# Altium PCB car_board.PcbDoc
Units mil, origin at the board's own origin, x right, y up, seen from the top; angles counter-clockwise.
Board outline 4485 x 2249 mil, 2 copper layers (Top Layer, Bottom Layer); 73 components, 79 nets, 374 pads, 109 vias.
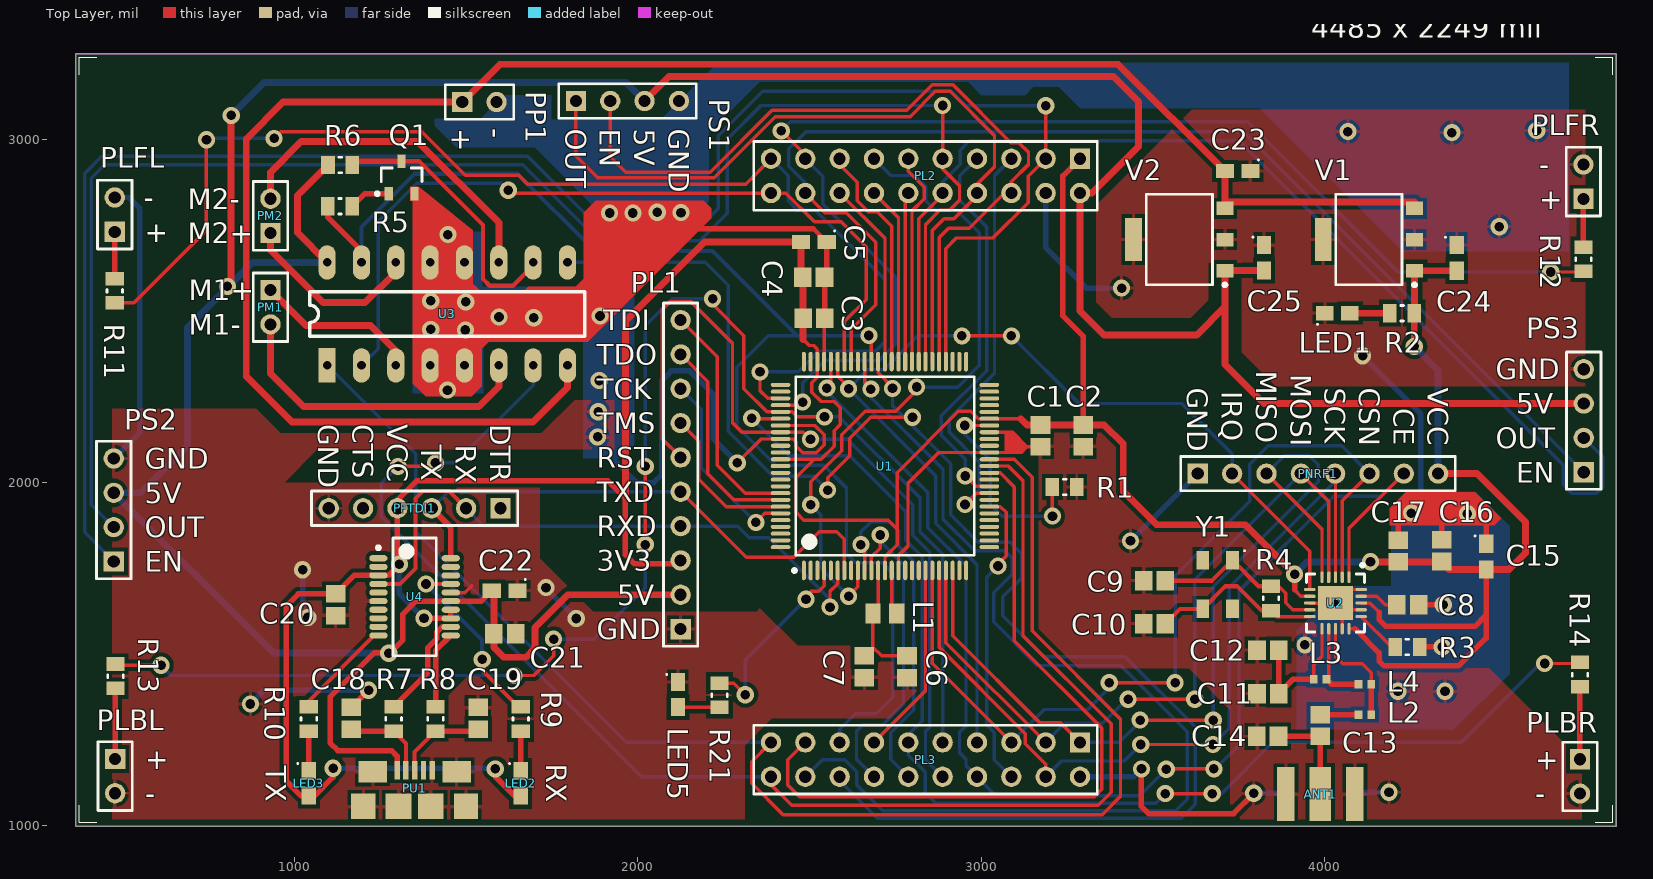
[diagram p0: Top Layer view]
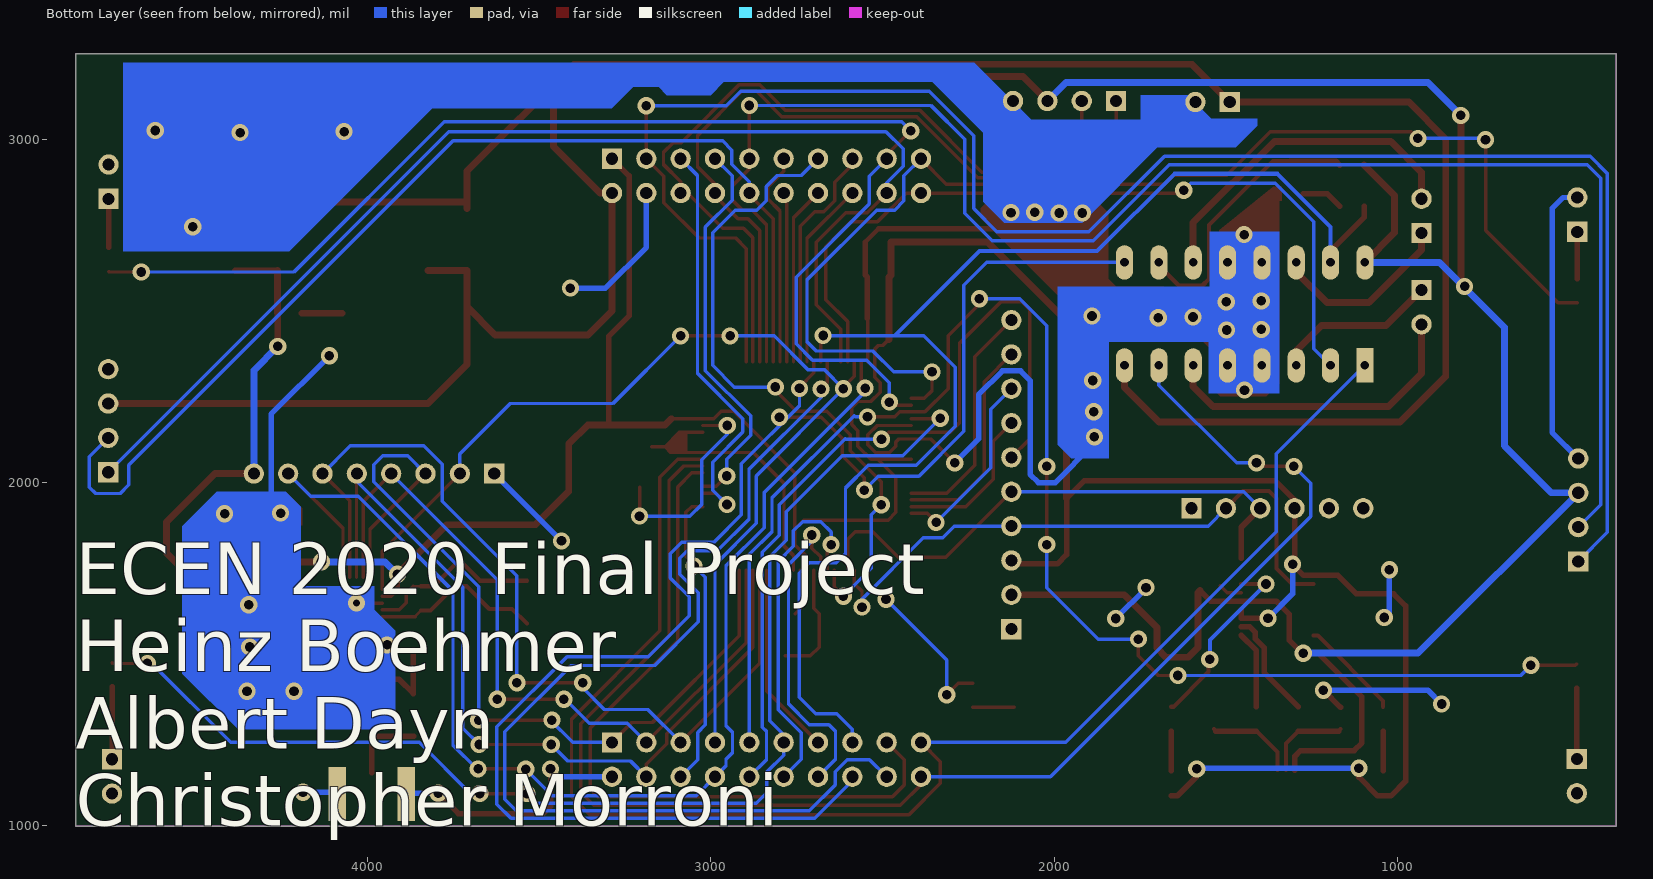
[diagram p1: Bottom Layer view, seen from below]

## Layer stack, top to bottom
Top Solder: solder mask 0.4, Solder Resist, Dk 3.5
Top Layer: signal copper 1.4
Dielectric 1: dielectric 12.6, FR-4, Dk 4.8
Bottom Layer: signal copper 1.4
Bottom Solder: solder mask 0.4, Solder Resist, Dk 3.5

## Board outline
364,999 364,3248 4849,3248 4849,999

## Design rules (kind name [scope] priority, off if disabled: settings)
BoardOutlineClearance [All] p1: gap=15
Clearance "Ground Plane Clearance" [InNet('GND') and InPolygon] p1: gap=12
Clearance [All] p2: gap=6
HoleSize [All] p1: absolutevalues=TRUE maxlimit=265 minlimit=13 maxpercent=80.000 minpercent=20.000
MinimumAnnularRing [All] p1: minimumring=7
MinimumSolderMaskSliver [All] p1: minsoldermaskwidth=4
PlaneConnect [All] p1: planeconnectstyle=Relief reliefexpansion=20 reliefentries=4 reliefconductorwidth=16 reliefairgap=10
PolygonConnect [All] p1: connectstyle=Relief reliefconductorwidth=10 reliefentries=4 polygonreliefangle="90 Angle" airgapwidth=10
RoomDefinition [InComponentClass('Components Class 1') vs False] p1: confinementstyle=ConfineIn formatcopy=TRUE lockcomponents=FALSE outline 4459.13,2403.55 3408.13,2403.55 3408.13,3071.55 4459.13,3071.55
RoomDefinition nrf [InComponentClass('nrf')] p2: confinementstyle=ConfineIn formatcopy=TRUE lockcomponents=FALSE outline 4583,2182 3416,2182 3416,999 4583,999
RoomDefinition motor_driver [InComponentClass('motor_driver')] p3: confinementstyle=ConfineIn formatcopy=TRUE lockcomponents=FALSE outline 1869.43,2051.43 1869.43,3060 749.43,3060 749.43,2051.43
RoomDefinition ftdi [InComponentClass('ftdi')] p4: confinementstyle=ConfineIn formatcopy=TRUE lockcomponents=FALSE outline 1855.15,1000 1855.15,2176 813.15,2176 813.15,1000
RoomDefinition car_msp_breakouts [InComponentClass('car_msp_breakouts')] p5: confinementstyle=ConfineIn formatcopy=TRUE lockcomponents=FALSE outline 2041,3030 2041,1017 3432,1017 3432,3030
RoutingVias [All] p1: holewidth=28 width=50 viastyle="Through Hole" minholewidth=28 minwidth=50 maxholewidth=28 maxwidth=50
SolderMaskExpansion "Tent Vias" [IsVia] p1: expansion=-25
SolderMaskExpansion [All] p2: expansion=4
Width [All] p1: maxlimit=20 minlimit=6 preferedwidth=12 minimp=50.000000 maximp=50.000000 favimp=50.000000
27 further rules are at their usual default settings.

## Classes and differential pairs
component class "Components Class 1": C23 C24 C25 LED1 R2 V1 V2
component class sensors: PS1 PS2 PS3
component class power: C23 C24 C25 LED1 PP1 R2 V1 V2
component class nrf: ANT1 C8 C9 C10 C11 C12 C13 C14 C15 C16 C17 L2 L3 L4 PNRF1 R3 R4 U2 Y1
component class motor_driver: PM1 PM2 Q1 R5 R6 U3
component class lights: PLBL PLBR PLFL PLFR R11 R12 R13 R14
component class ftdi: C18 C19 C20 C21 C22 LED2 LED3 PFTDI1 PU1 R7 R8 R9 R10 U4
component class car_msp_breakouts: C1 C2 C3 C4 C5 C6 C7 L1 LED5 PL1 PL2 PL3 R1 R21

## Components (designator, comment, footprint, x,y, rotation, side; value= is the part's Value field where it differs from the comment)
ANT1 "Connector" RP-SMA 3988,1014 r0 top
C1 "Cap" 0805-C 3173,2136 r90 top
C2 "Cap" 0805-C 3297,2136 r90 top
C3 "Cap" 0805-C 2513,2478 r180 top
C4 "Cap" 0805-C 2512.5,2598 r180 top
C5 "Cap Pol1" 0805-TC 2513,2700 r0 top
C6 "Cap" 0805-C 2784,1463.5 r90 top
C7 "Cap" 0805-C 2660,1463.5 r90 top
C8 "Cap" 0805-C 4242.5,1644 r180 top
C9 "Cap" 0805-C 3504.5,1714 r0 top
C10 "Cap" 0805-C 3504.5,1589 r0 top
C11 "Cap" 0805-C 3835,1385 r0 top
C12 "Cap" 0805-C 3835,1512 r0 top
C13 "Cap" 0805-C 3988,1292.5 r270 top
C14 "Cap" 0805-C 3834.5,1261 r0 top
C15 "Cap Pol1" 0805-TC 4471,1784.4 r90 top
C16 "Cap" 0805-C 4341,1801.5 r270 top
C17 "Cap" 0805-C 4215,1800.5 r270 top
C18 "Cap" 0805-C 1166.15,1313.5 r270 top
C19 "Cap" 0805-C 1535.15,1313.5 r270 top
C20 "Cap" 0805-C 1120.15,1644 r90 top
C21 "Cap" 0805-C 1612.65,1559 r180 top
C22 "Cap Pol1" 0805-TC 1612.55,1685 r0 top
C23 "Cap Pol1" 0805-TC 3747.4,2907.1 r0 top
C24 "Cap Pol1" 0805-TC 4385.13,2654.15 r90 top
C25 "Cap Pol1" 0805-TC 3824,2654.5 r90 top
L1 "Inductor" 0805-L 2719.84,1618 r180 top
L2 "Inductor" 0402-L 4117.5,1324 r180 top
L3 "Inductor" 0402-L 3987.5,1427 r180 top
L4 "Inductor" 0402-L 4117.5,1413 r0 top
LED1 "LED2" 0805-LED 4037.58,2493.1 r180 top
LED2 "RED" 0805-LED 1659.15,1123.58 r90 top
LED3 "YELLOW" 0805-LED 1042.15,1123.58 r90 top
LED5 "LED2" 0805-LED 2117,1382.58 r90 top
PFTDI1 "Header 6" HDR1X6 1600.15,1925 r180 top
PL1 "Programming_Header" HDR1X10 2125,1573 r90 top
PL2 "Left_Launchpad_Header" HDR2X10 3288,2943 r180 top
PL3 "Right_Launchpad_Header" HDR2X10 3288,1243 r180 top
PLBL "Header 2" HDR1X2 478,1195 r270 top
PLBR "Header 2" HDR1X2 4744,1194 r270 top
PLFL "Header 2" HDR1X2 477,2730 r90 top
PLFR "Header 2" HDR1X2 4754,2826 r90 top
PM1 "Header 2" HDR1X2 930.43,2560.43 r270 top
PM2 "Header 2" HDR1X2 930.43,2726.43 r90 top
PNRF1 "nRF_Bypass" HDR1X8 3631,2026 r0 top
PP1 "Header 2" HDR1X2 1489,3108 r0 top
PS1 "Header 4" HDR1X4 1820,3111 r0 top
PS2 "Header 4" HDR1X4 474,1770 r90 top
PS3 "Header 4" HDR1X4 4755,2030 r90 top
PU1 "Micro_USB" Micro_USB 1350.39,999.91 r0 top
Q1 "NPN" SOT23 1312.43,2888.43 r90 top
R1 "Res1" 0805-R 3243,1987 r0 top
R2 "Res1" 0805-R 4226,2493.1 r180 top
R3 "Res1" 0805-R 4241.57,1521 r180 top
R4 "Res1" 0805-R 3844,1662.43 r270 top
R5 "Res1" 0805-R 1132.99,2804.43 r0 top
R6 "Res1" 0805-R 1133.43,2924.43 r180 top
R7 "Res1" 0805-R 1289.15,1311.43 r90 top
R8 "Res1" 0805-R 1411.15,1311.43 r90 top
R9 "Res1" 0805-R 1659.15,1311.43 r270 top
R10 "Res1" 0805-R 1042.15,1311.43 r270 top
R11 "Res1" 0805-R 477,2558.43 r90 top
R12 "Res1" 0805-R 4754,2650 r90 top
R13 "Res1" 0805-R 479,1436 r270 top
R14 "Res1" 0805-R 4744,1440.43 r270 top
R21 "Res1" 0805-R 2238,1380.57 r270 top
U1 "MSP432P401R" TSQFP50P1600X1600X160-100N 2720,2048 r90 top
U2 "nRF24L01+" QFN50P400X400X95_HS-21N 4032,1649 r270 top
U3 "SN754410" DIP16 1095.45,2341 r90 top
U4 "FTS31XS-U" SOP64P570X175-20N 1350.15,1667 r0 top
V1 "3.3V Regulator" SOT230P700X180-4N 4129.13,2707.55 r180 top
V2 "5V Regulator" SOT230P700X180-4N 3577.13,2707.55 r180 top
Y1 "16MHz" DFNCRY 3688.69,1702.87 r270 top

## Footprints (in the part's own frame and the unit in brackets; to place one, negate y for a bottom-side part, rotate by r counter-clockwise, add the part's x,y. Pads: shape width x height; smd on the part's side, far side on the other; paste and mask are expansions set on the pad)
0402-L [mm] "Chip Inductor, 2-Leads, Body 1.00x0.50mm, IPC Medium Density"
  rect 0.57x0.62 smd: 1(-0.47,0) 2(0.47,0)
  body extent -0.53,-0.28 0.53,0.27, height 0.55
0805-C [mm] "Chip Capacitor, 2-Leads, Body 2.00x1.25mm, IPC Medium Density"
  rect 1.3x1.45 smd: 1(-0.8,0) 2(0.8,0)
  body extent -1.1,-0.72 1.1,0.72, height 1.4
0805-L [mm] "Chip Inductor, 2-Leads, Body 2.00x1.25mm, IPC Medium Density"
  rect 1.13x1.47 smd: 1(-0.885,0) 2(0.885,0)
  body extent -1.1,-0.72 1.1,0.72, height 1.45
0805-LED [mm] "Molded Diode, 2-Leads, Body 2.00x1.25mm, IPC Medium Density"
  rect 1.3x1.05 smd: 1(-0.925,0) 2(0.925,0)
  silkscreen extent 1.43,0.78 1.52,0.87, body extent -1.05,-0.67 1.05,0.67, height 0.4
0805-R [mm] "Chip Resistor, 2-Leads, Body 2.00x1.25mm, IPC Medium Density"
  rect 1x1.35 smd: 1(-0.9,0) 2(0.9,0)
  silkscreen extent -0.1,-0.58 0.1,0.58, body extent -1.05,-0.67 1.05,0.67, height 0.6
0805-TC [mm] "Molded Capacitor, 2-Leads, Body 2.05x1.40mm, IPC Medium Density"
  rect 1.35x1.05 smd: 1(-0.95,0) 2(0.95,0)
  silkscreen extent 1.48,0.78 1.57,0.87, body extent -1.13,-0.77 1.12,0.77, height 1.5
DFNCRY [mm] "DFN, 4-Leads, Body 3.20x5.00mm, Pitch 3.60mm, IPC Medium Density"
  rect 1.35x0.95 smd: 1(-1.8,1.1) 2(-1.8,-1.1) 3(1.8,-1.1) 4(1.8,1.1)
  silkscreen extent -2.55,1.95 -2.45,2.05, body extent -2.5,-1.6 2.5,1.6, height 1
DIP16 [mil]
  rect 100x50 hole 25: 1(0,0)
  oval 100x50 hole 25: 2(0,-100) 3(0,-200) 4(0,-300) 5(0,-400) 6(0,-500) 7(0,-600) 8(0,-700) 9(300,-700) 10(300,-600) 11(300,-500) 12(300,-400) 13(300,-300) 14(300,-200) 15(300,-100) 16(300,0)
  silkscreen extent 85,-750 215,50
HDR1X2 [mm] "Connector; Header; 2 Position"
  rect 1.5x1.5 hole 0.9: 1(0,0)
  round 1.5 hole 0.9: 2(2.54,0)
  silkscreen extent -1.27,-1.27 3.81,1.27
HDR1X4 [mm] "Connector; Header; 4 Position"
  rect 1.5x1.5 hole 0.9: 1(0,0)
  round 1.5 hole 0.9: 2(2.54,0) 3(5.08,0) 4(7.62,0)
  silkscreen extent -1.27,-1.27 8.89,1.27
HDR1X6 [mm] "Connector; Header; 6 Position"
  rect 1.5x1.5 hole 0.9: 1(0,0)
  round 1.5 hole 0.9: 2(2.54,0) 3(5.08,0) 4(7.62,0) 5(10.16,0) 6(12.7,0)
  silkscreen extent -1.27,-1.27 13.97,1.27
HDR1X8 [mm] "Connector; Header; 8 Position"
  rect 1.5x1.5 hole 0.9: 1(0,0)
  round 1.5 hole 0.9: 2(2.54,0) 3(5.08,0) 4(7.62,0) 5(10.16,0) 6(12.7,0) 7(15.24,0) 8(17.78,0)
  silkscreen extent -1.27,-1.27 19.05,1.27
HDR1X10 [mm] "Connector; Header; 10 Position"
  rect 1.5x1.5 hole 0.9: 1(0,0)
  round 1.5 hole 0.9: 2(2.54,0) 3(5.08,0) 4(7.62,0) 5(10.16,0) 6(12.7,0) 7(15.24,0) 8(17.78,0) 9(20.32,0) 10(22.86,0)
  silkscreen extent -1.27,-1.27 24.13,1.27
HDR2X10 [mm] "Connector; Header; 10x2 Position"
  rect 1.5x1.5 hole 0.9: 1(0,0)
  round 1.5 hole 0.9: 2(0,2.54) 3(2.54,0) 4(2.54,2.54) 5(5.08,0) 6(5.08,2.54) 7(7.62,0) 8(7.62,2.54) 9(10.16,0) 10(10.16,2.54) 11(12.7,0) 12(12.7,2.54) 13(15.24,0) 14(15.24,2.54) 15(17.78,0) 16(17.78,2.54) 17(20.32,0) 18(20.32,2.54) 19(22.86,0) 20(22.86,2.54)
  silkscreen extent -1.27,-1.27 24.13,3.81
Micro_USB [mm]
  rect 1.8x1.9 smd: 0(-3.8,1.45) 0(3.8,1.45)
  rect 2.1x1.6 smd: 0(-3.1,4) 0(3.1,4)
  rect 1.9x1.9 smd: 0(-1.2,1.45) 0(1.2,1.45)
  rect 0.4x1.35 smd: 1(-1.3,4.125) 2(-0.65,4.125) 3(0,4.125) 4(0.65,4.125) 5(1.3,4.125)
QFN50P400X400X95_HS-21N [mm] "QFN, 20-Leads, Body 4.00x4.00mm, Pitch 0.50mm, Thermal Pad 2.50x2.60mm, IPC Medium Density"
  rect 2.5x2.6 smd: 0(0,0)
  oval 0.85x0.25 smd: 1(-1.9,1) 2(-1.9,0.5) 3(-1.9,0) 4(-1.9,-0.5) 5(-1.9,-1) 11(1.9,-1) 12(1.9,-0.5) 13(1.9,0) 14(1.9,0.5) 15(1.9,1)
  oval 0.25x0.85 smd: 6(-1,-1.9) 7(-0.5,-1.9) 8(0,-1.9) 9(0.5,-1.9) 10(1,-1.9) 16(1,1.9) 17(0.5,1.9) 18(0,1.9) 19(-0.5,1.9) 20(-1,1.9)
  silkscreen extent -2.92,-2.15 2.15,2.15, body extent -2,-2 2,2, height 0.95
RP-SMA [mm]
  rect 1.3x4 smd: 1(-2.55,2) 3(2.55,2)
  rect 1.6x4 smd: 2(0,2)
  rect 1.3x4 smd far side: 4(2.55,2) 5(-2.55,2)
SOP64P570X175-20N [mm] "SOP, 20-Leads, Body 8.65x3.90mm, Pitch 0.64mm, IPC Medium Density"
  oval 1.35x0.45 smd: 1(-2.675,2.857) 2(-2.675,2.222) 3(-2.675,1.587) 4(-2.675,0.953) 5(-2.675,0.318) 6(-2.675,-0.318) 7(-2.675,-0.953) 8(-2.675,-1.587) 9(-2.675,-2.222) 10(-2.675,-2.857) 11(2.675,-2.857) 12(2.675,-2.222) 13(2.675,-1.587) 14(2.675,-0.953) 15(2.675,-0.318) 16(2.675,0.318) 17(2.675,0.953) 18(2.675,1.587) 19(2.675,2.222) 20(2.675,2.857)
  silkscreen extent -2.8,-4.35 1.6,4.35, body extent -2,-4.35 2,4.35, height 1.76
SOT23 [mm] "SOT23, 3-Leads, Body 2.92x2.37mm, Pitch 0.95mm, IPC Medium Density"
  rect 1x0.6 smd: 1(-1.2,0.95) 2(-1.2,-0.95) 3(1.2,0)
  silkscreen extent -1.32,-1.5 0.7,1.92, body extent -0.7,-1.52 0.7,1.52, height 1.11
SOT230P700X180-4N [mm] "SOT223, 4-Leads, Body 6.50x7.00mm (avg), Pitch 2.30mm, IPC Medium Density"
  rect 1.25x1 smd: 1(-3.375,2.3) 2(-3.375,0) 3(-3.375,-2.3)
  rect 1.25x3.2 smd: 2(3.375,0)
  silkscreen extent -3.5,-3.35 2.45,3.47, body extent -1.85,-3.35 1.85,3.35, height 1.8
TSQFP50P1600X1600X160-100N [mm] "TSQFP, 100-Leads, Body 14.00x14.00mm, Pitch 0.50mm, IPC Medium Density"
  oval 1.45x0.3 smd: 1(-7.725,6) 2(-7.725,5.5) 3(-7.725,5) 4(-7.725,4.5) 5(-7.725,4) 6(-7.725,3.5) 7(-7.725,3) 8(-7.725,2.5) 9(-7.725,2) 10(-7.725,1.5) 11(-7.725,1) 12(-7.725,0.5) 13(-7.725,0) 14(-7.725,-0.5) 15(-7.725,-1) 16(-7.725,-1.5) 17(-7.725,-2) 18(-7.725,-2.5) 19(-7.725,-3) 20(-7.725,-3.5) 21(-7.725,-4) 22(-7.725,-4.5) 23(-7.725,-5) 24(-7.725,-5.5) 25(-7.725,-6) 51(7.725,-6) 52(7.725,-5.5) 53(7.725,-5) 54(7.725,-4.5) 55(7.725,-4) 56(7.725,-3.5) 57(7.725,-3) 58(7.725,-2.5) 59(7.725,-2) 60(7.725,-1.5) 61(7.725,-1) 62(7.725,-0.5) 63(7.725,0) 64(7.725,0.5) 65(7.725,1) 66(7.725,1.5) 67(7.725,2) 68(7.725,2.5) 69(7.725,3) 70(7.725,3.5) 71(7.725,4) 72(7.725,4.5) 73(7.725,5) 74(7.725,5.5) 75(7.725,6)
  oval 0.3x1.45 smd: 26(-6,-7.725) 27(-5.5,-7.725) 28(-5,-7.725) 29(-4.5,-7.725) 30(-4,-7.725) 31(-3.5,-7.725) 32(-3,-7.725) 33(-2.5,-7.725) 34(-2,-7.725) 35(-1.5,-7.725) 36(-1,-7.725) 37(-0.5,-7.725) 38(0,-7.725) 39(0.5,-7.725) 40(1,-7.725) 41(1.5,-7.725) 42(2,-7.725) 43(2.5,-7.725) 44(3,-7.725) 45(3.5,-7.725) 46(4,-7.725) 47(4.5,-7.725) 48(5,-7.725) 49(5.5,-7.725) 50(6,-7.725) 76(6,7.725) 77(5.5,7.725) 78(5,7.725) 79(4.5,7.725) 80(4,7.725) 81(3.5,7.725) 82(3,7.725) 83(2.5,7.725) 84(2,7.725) 85(1.5,7.725) 86(1,7.725) 87(0.5,7.725) 88(0,7.725) 89(-0.5,7.725) 90(-1,7.725) 91(-1.5,7.725) 92(-2,7.725) 93(-2.5,7.725) 94(-3,7.725) 95(-3.5,7.725) 96(-4,7.725) 97(-4.5,7.725) 98(-5,7.725) 99(-5.5,7.725) 100(-6,7.725)
  silkscreen extent -7.85,-6.6 6.6,6.82, body extent -7,-7 7,7, height 1.6

## Part data
ANT1: library part Antenna_Connector
C1 C2 C3 C4 C6 C7 C8 C9 C10 C11 C12 C13 C14 C16 C17 C18 C19 C20 C21: "Capacitor"
C5 C15 C22 C23 C24 C25: "Polarized Capacitor (Radial)"
LED1 LED5: "Typical RED, GREEN, YELLOW, AMBER GaAs LED"
LED2 LED3: library part LED2, "Typical RED, GREEN, YELLOW, AMBER GaAs LED"
PFTDI1: "Header, 6-Pin"
PL1: library part "Header 10", "Header, 10-Pin"
PL2 PL3: library part "Header 10X2", "Header, 10-Pin, Dual row"
PLBL PLBR PLFL PLFR PM1 PM2 PP1: "Header, 2-Pin"
PNRF1: library part "Header 8", "Header, 8-Pin"
PS1 PS2 PS3: "Header, 4-Pin"
Q1: "NPN Bipolar Transistor"
R1 R2 R3 R4 R5 R6 R7 R8 R9 R10 R11 R12 R13 R14 R21: "Resistor"
U1: library part MSP432
V1 V2: library part NCP1117
Y1: library part XTAL, "Crystal Oscillator"

## Via types
v1: diameter 50, hole 28, Top Layer to Bottom Layer, 107 vias
v2: diameter 50, hole 20, Top Layer to Bottom Layer, 1 vias
v3: diameter 50, hole 28, Top Layer to Bottom Layer, tented both sides, 1 vias

## Nets (pads, with @x,y where several pads share a name; then routed paths per layer and width w, separated by ;. In a path a pad name is that pad's centre, name@x,y a point inside that pad or via, vN(x,y) a via of type N, cw(c..) or ccw(c..) an arc to the next point about the centre after c; other vN are vias at no path point)
3V3: C1.2 C2.2 C3.2 C4.2 C5.1 C15.1 C16.2 C17.2 C20.2 C24.1 LED2.1 LED3.1 PFTDI1.4 PL1.3 PL2.1 PNRF1.8 R2.1 U1.13 U1.45 U1.73 U1.87 U2.7 U2.15 U2.18 U4.3 U4.13 U4.14 V1.1 | length 11391.5
  Top Layer w10: v1@1300.15,1767.85 v1(1306,1762) ; U1.87 2513.68,2067.68 ; 2481.5,2416.5 2499,2399 2513,2399 2523.15,2388.85 U1.73 2523.15,2307.15 2507,2291 2507,2263 2534,2236 2572,2236 2590,2218 2590,2169 2572,2151 2572,2106 2533.68,2067.68 2513.68,2067.68 ; U1.13 2720,1783 2756,1819 2756,1864 ; 3115.2,2185.8 U1.45 2991.2,2185.8 2970,2207 2934,2207 2756,2029 2756,1864 ; 3913,1687 3931.32,1668.68 U2.7 ; U2.15 4088.8,1574.2 ; U2.18 4132,1649 4159,1622 ; 2513.68,2067.68 2461,2015 2461,1913 2484,1890 2730,1890 2756,1864
  Top Layer w16: v1(1113,1168) 1113,1142 1058.17,1087.17 LED3.1 1019.83,1087.17 977,1130 977,1641 1011.5,1675.5 C20.2 1174.15,1729.5 U4.3 1273.5,1729.5 v1(1306,1762) ; v1@1300.15,1767.85 PFTDI1.4 1300.15,1949.15 1356,2005 1913,2005 1964,1954 1964,1790 1991,1763 2115,1763 PL1.3 ; v1(1377.5,1604.5) U4.13 U4.14 ; v1(1585,1166) 1585,1144 1641.83,1087.17 LED2.1 ; PL2.1 3238,2893 3238,2485 3297,2426 C2.2 ; 3913,1687 v1(3913,1733) ; 4088.8,1574.2 4159,1504 4159,1480 4173,1466 4390,1466 4471,1547 4471,1614 ; 4159,1622 4159,1601 4179,1581 4438,1581 4471,1614 ; C15.1 4471,1614
  Top Layer w20: 1964,1954 1964,2470 2194,2700 C5.1 2475.6,2603.4 C4.2 2481.5,2597.5 C3.2 2481.5,2416.5 ; 3115.2,2185.8 3133.5,2167.5 C1.2 C2.2 3358.5,2167.5 3414,2112 3414,1974 3511,1877 3769,1877 v1(3913,1733) ; v1(4134,1769) C17.2 4340,1769 4362,1747 C15.1 4538,1747 4585,1794 4585,1885 4444,2026 PNRF1.8 ; v1(4261.43,2396.43) R2.1 4262,2493.67 V1.1 4262.25,2616.75 C24.1
  Bottom Layer w16: v1(1113,1168) 1583,1168 v1(1585,1166) ; v1(1306,1762) 1306,1676 v1(1377.5,1604.5)
  Bottom Layer w20: v1(3913,1733) 3949,1769 v1(4134,1769) ; v1(4261.43,2396.43) 4331,2326.87 PNRF1.8
5V: C21.2 C22.1 C25.1 PL1.2 PL2.2 PS1.3 PS2.3 PS3.3 PU1.1 R6.2 U3.16 U4.15 V2.1 | length 10242.6
  Top Layer w16: v1@1275,1504 1232,1504 1104,1376 1104,1242 1127,1219 1283,1219 1299.21,1202.79 PU1.1 ; v1@1279,1504 1316,1541 1316,1617 1353.5,1654.5 U4.15 1544.65,1654.5 C22.1
  Top Layer w20: v1(805,2571) 816,2582 v1(816,3069) ; U3.16 1009,2727.45 1009,2835.43 R6.2 ; C22.1 1581.15,1679 C21.2 1581.15,1519.85 1610,1491 1674,1491 1701,1518 1701,1578 1796,1673 PL1.2 ; PS1.3 2091,3182 3386,3182 3458,3110 3458,2978 3323,2843 PL2.2 3288,2500 3358,2430 3628,2430 3710,2512 ; C25.1 3823.9,2617 V2.1 3710,2512 ; PS3.3 3824,2230 3710,2344 3710,2512
  Bottom Layer w20: v1(816,3069) 912,3165 1966,3165 PS1.3 ; U3.16 878,2641 689,2452 689,2107 552,1970 PS2.3 941,1503 v1(1275,1503)
7V5: C23.1 PP1.1 U3.8 V1.3 V2.3 | length 5537.3
  Top Layer w20: U3.8 1795.45,2276.45 1695,2176 993,2176 860,2309 860,3001 967,3108 PP1.1 1599,3218 3399.1,3218 C23.1 V2.3@3710,2817 ; V2.3 V2.3@3710,2817 ; V1.3 4262,2817 V2.3@3710,2817
GND: ANT1.1 ANT1.3 ANT1.4 ANT1.5 C1.1 C2.1 C3.1 C4.1 C5.2 C6.1 C7.1 C8.1 C9.1 C10.1 C11.1 C12.1 C14.1 C15.2 C16.1 C17.1 C18.1 C19.1 C20.1 C21.1 C22.2 C23.2 C24.2 C25.2 LED1.2 LED5.2 PFTDI1.6 PL1.1 PL2.4 PL3.2 PLBL.2 PLBR.2 PLFL.2 PLFR.2 PNRF1.1 PP1.2 PS1.4 PS2.4 PS3.4 PU1.0 PU1.5 Q1.2 R1.2 R3.1 U1.15 U1.40 U1.43 U1.72 U1.82 U1.84 U2.0 U2.8 U2.14 U2.17 U2.20 U3.4 U3.5 U3.12 U3.13 U4.6 U4.16 V1.2 V2.2 | length 7571.4
  Top Layer w8: U2.0@4051.68,1629.32 v2(4032,1649) U2.0@4071.37,1688.37 ; U2.0@4053.65,1627.35 U2.0@4055.62,1629.31
  Top Layer w10: U4.16 1496.5,1679.5 1516,1699 ; v1(2290,2057) 2359.74,2126.74 U1.84 2453.26,2126.74 2462,2118 2462,2106 2481,2087 2520,2087 2543,2110 2543,2139 2515.89,2166.11 U1.82 ; U1.72 2542.83,2476.34 C3.1 ; U1.15 2759.37,1787.37 2787,1815 2787,1998 2876.37,2087.37 U1.40 3116.36,2087.37 3133.5,2104.5 ; U1.43 3091.57,2146.43 3133.5,2104.5 ; C1.1 3133.5,2104.5 ; U2.8 v2(4032,1649) ; U2.14 U2.0@4051.68,1629.32 ; U2.0@4055.62,1629.31 U2.17 ; U2.0@4071.37,1688.37 U2.20
  Top Layer w12: v1(2126,2786) 2173,2739 ; 2511.4,2739 C5.2
  Top Layer w16: C18.1 v1(1216.16,1395) ; 2173,2739 2511.4,2739 ; C3.1 2544.5,2597.5 C4.1 2550.4,2604.41 C5.2 ; v1(3467,1166) 3467,1057 3488,1036 3735,1036 v1(3794,1095) ; C17.1 4215,1889 ; C8.1 v1(4346,1644) ; R3.1 v1(4343,1521) ; C16.1 4341,1889 ; C15.2 4471,1890
  Bottom Layer w10: v1@1733,1692 v1(1733,1694)
  Bottom Layer w16: PS2.4 550,2146 550,2798 518,2830 PLFL.2 ; v1(872,1355) 912,1395 v1(1216.16,1395) ; v1(1024,1746) 1024,1622 v1(1039,1607) ; v1@1733,1692 v1(1821,1604) ; v1(1888,2297) 1888,2109 1997,2000 2046,2000 2070,2024 2070,2297 2098,2325 2151,2325 2220,2256 2220,2127 v1(2290,2057) ; PL2.4 3188,2685 3307,2566 v1(3409,2566) ; PL3.2 3444,1143 v1(3467,1166) ; v1(3435,1830) PNRF1.1 ; v1(3794,1095) 3885.35,1095 ANT1.5 ; ANT1.4 4093.65,1098 v1(4188,1098) ; v1(4111,2369) 4281,2199 4281,1939 v1(4253,1911)
  other v1: 4214,1392 4351,1392 3943,1527 4416,1909 1883,2133 1885,2206 1446,2269 1498,2444 1397,2446 1697,2480 1596,2482 1890,2485 1499,2526 1397,2529 1447,2722 4509,2745 1918,2785 1986,2785 2057,2787 4371,3019 4068,3022 4618,3025
M1+: PM1.1 U3.3 | length 480.8
  Top Layer w20: PM1.1 1033.85,2457 1222,2457 1295.45,2383.55 U3.3
M1-: PM1.2 U3.6 | length 933.6
  Top Layer w20: PM1.2 930.43,2317.57 1027,2221 1537,2221 1595.45,2279.45 U3.6
M2+: PM2.1 U3.14 | length 542.1
  Top Layer w20: PM2.1 930.43,2677.57 1084,2524 1206,2524 1295.45,2613.45 U3.14
M2-: PM2.2 U3.11 | length 992.6
  Top Layer w20: PM2.2 930.43,2903.43 1020,2993 1359,2993 1595.45,2756.55 U3.11
NetANT1_2: ANT1.2 C13.2 C14.2 | length 228
  Top Layer w16: C14.2 C13.2 ANT1.2@3988,1155
NetC6_2: C6.2 C7.2 L1.2 U1.12 | length 339.6
  Top Layer w10: U1.12 2700.31,1633.31 L1.2 2685,1520 2710,1495 C6.2
NetC8_2: C8.2 U2.19 | length 114.4
  Top Layer w10: U2.19 4152.31,1668.68 4177,1644 C8.2
NetC9_2: C9.2 R4.1 U2.9 Y1.1 | length 521.6
  Top Layer w8: R4.1 R4.1@3866.13,1697.87
  Top Layer w10: R4.1@3866.13,1697.87 3887,1677 3887,1650 3907.69,1629.31 U2.9
  Top Layer w12: C9.2 3672.27,1714 Y1.1 3807.87,1697.87 R4.1
NetC10_2: C10.2 R4.2 U2.10 Y1.3 | length 503
  Top Layer w8: R4.2 R4.2@3861.37,1609.63
  Top Layer w10: R4.2@3861.37,1609.63 U2.10
  Top Layer w12: C10.2 3579,1632 Y1.3 3711.39,1698 3745,1698 3816,1627 R4.2
NetC11_2: C11.2 C12.2 L3.2 U2.11 | length 403.9
  Top Layer w10: L3.2 3968.99,1469.99 3992.63,1493.63 U2.11
  Top Layer w16: C12.2 C11.2 3908.5,1427 L3.2
NetC13_1: C13.1 L2.2 | length 111
  Top Layer w16: C13.1 L2.2
NetC18_2: C18.2 PU1.2 R7.1 | length 253.9
  Top Layer w12: C18.2 C18.2@1172.15,1276 ; R7.1 1324.8,1240.35 PU1.2
  Top Layer w16: C18.2@1172.15,1276 R7.1
NetC19_2: C19.2 PU1.3 R8.1 | length 265.3
  Top Layer w12: PU1.3 1350.39,1215.24 R8.1 ; C19.2@1529.15,1276 C19.2
  Top Layer w16: R8.1 C19.2@1529.15,1276
NetL1_1: L1.1 U1.14 | length 132.1
  Top Layer w10: U1.14 2739.68,1633 L1.1
NetL2_1: L2.1 L4.2 U2.13 | length 326.7
  Top Layer w10: U2.13 4032,1493 4053,1472 4110,1472 4136,1446 L4.2
  Top Layer w16: L2.1 L4.2
NetL3_1: L3.1 L4.1 U2.12 | length 248.6
  Top Layer w8: L3.1 L3.1@4012.31,1433.31
  Top Layer w10: L3.1@4012.31,1433.31 U2.12
  Top Layer w16: L3.1 4020,1413 L4.1
NetLED1_1: LED1.1 R2.2 | length 116.6
  Top Layer w20: LED1.1 R2.2
NetLED2_2: LED2.2 R9.2 | length 116
  Top Layer w16: LED2.2 R9.2
NetLED3_2: LED3.2 R10.2 | length 116
  Top Layer w16: LED3.2 R10.2
NetLED5_1: LED5.1 R21.2 | length 121.4
  Top Layer w10: LED5.1 2118.03,1345.13 R21.2
NetPLBL_1: PLBL.1 R13.2 | length 206
  Top Layer w16: PLBL.1 479,1196 R13.2
NetPLBR_1: PLBR.1 R14.2 | length 211
  Top Layer w16: PLBR.1 R14.2
NetPLFL_1: PLFL.1 R11.2 | length 136.1
  Top Layer w16: R11.2 PLFL.1
NetPLFR_1: PLFR.1 R12.2 | length 140.6
  Top Layer w16: R12.2 PLFR.1
NetQ1_1: Q1.3 R6.1 U3.10 | length 807.2
  Top Layer w12: Q1.3 1363.33,2935.67 1549,2750 1549,2593 1569,2573 1637,2573 1695.45,2631.45 U3.10
  Top Layer w16: R6.1 1180.1,2935.67 Q1.3
NetQ1_2: Q1.1 R5.2 | length 121.8
  Top Layer w16: R5.2 1205.18,2841.18 Q1.1
NetR1_1: R1.1 U1.44 | length 613.4
  Top Layer w10: v1(2952.11,2166.11) U1.44 ; R1.1 3207.57,1902.43 v1(3208,1902)
  Bottom Layer w10: v1(2952.11,2166.11) 2952.11,2140.89 3027,2066 3027,1936 3061,1902 v1(3208,1902)
NetR3_2: R3.2 U2.16 | length 136
  Top Layer w10: U2.16 4195.43,1521 R3.2
NetR7_2: R7.2 U4.12 | length 316.2
  Top Layer w16: R7.2 1389.15,1446.87 1389.15,1519.3 1414.89,1545.04 1414.89,1563.97 1430.42,1579.5 U4.12
NetR8_2: R8.2 U4.11 | length 226
  Top Layer w16: R8.2 1411.15,1510.19 U4.11
NetR9_1: R9.1 U4.17 | length 545.6
  Top Layer w12: v1(1383.5,1704.5) U4.17 ; v1@1551,1485 1551,1449 1653.13,1346.87 R9.1
  Bottom Layer w12: v1(1383.5,1704.5) 1547,1541 v1(1547,1485)
NetR10_1: R10.1 U4.10 | length 298.8
  Top Layer w12: R10.1 1042.15,1364.15 1232.5,1554.5 U4.10
P1.5: PL2.13 U1.9 | length 1936
  Top Layer w10: v1(2504,1935) 2504,2002 2594,2092 2594,2139 2663,2208 2751,2208 2812,2269 v1(2812,2278) ; v1(2614,1669) 2641.26,1696.26 U1.9
  Bottom Layer w10: v1(2504,1935) 2533,1906 2533,1750 v1(2614,1669) ; PL2.13 2737,2894 2807,2894 2839,2862 2839,2820 2866,2793 2929,2793 2995,2727 2995,2341 2932,2278 v1(2812,2278)
P1.6: PL3.12 U1.10 | length 1033.5
  Top Layer w10: v1(2649.89,1819) 2660.94,1807.94 U1.10
  Bottom Layer w10: v1(2649.89,1819) 2649.89,1855.89 2680,1886 2733,1886 2760,1859 2760,1814 2804,1770 2804,1338 2737,1271 2737,1194 PL3.12
P1.7: PL3.14 U1.11 | length 957.1
  Top Layer w10: U1.11 2680.63,1783.63 2706,1809 v1(2706,1847)
  Bottom Layer w10: PL3.14 2637,1194 2637,1276 2656,1295 2713,1295 2774,1356 2774,1761 2706,1829 v1(2706,1847)
P2.3: PL3.13 U1.19 | length 563
  Top Layer w10: PL3.13 2838.11,1393.11 U1.19
P2.4: PL3.5 PNRF1.6 U1.20 U2.2 | length 2619.9
  Top Layer w10: U1.20 2857.8,1473.2 PL3.5 ; v1(3373,1417) v1(3565,1417) ; U2.2 4051.68,1946.68 PNRF1.6
  Bottom Layer w10: PL3.5 3184,1339 3310,1339 3373,1402 v1(3373,1417) ; v1(3565,1417) 3565,1729 3782,1946 3782,2053 3836,2107 4050,2107 PNRF1.6
P2.5: PL3.4 PNRF1.5 U1.21 U2.3 | length 2494.5
  Top Layer w10: U1.21 2877.48,1519.52 3128.53,1268.47 3128.53,1239.47 3188,1180 PL3.4 ; v1(3465,1237) v1(3675,1237) ; PNRF1.5 4032,2025 U2.3
  Bottom Layer w10: PL3.4 3234,1189 3417,1189 v1(3465,1237) ; v1(3675,1237) 3722,1284 3722,1695 4031,2004 PNRF1.5
P2.6: PL3.3 PNRF1.4 U1.22 U2.4 | length 2228.4
  Top Layer w10: U1.22 2897.17,1533.83 PL3.3 ; v1(3428,1369) v1(3622,1369) ; PNRF1.4 4012.31,1944.69 U2.4
  Bottom Layer w10: PL3.3 3244,1299 3354,1299 3424,1369 v1(3428,1369) ; v1(3622,1369) 3622,1717 PNRF1.4
P2.7: PL3.1 PNRF1.3 U1.23 U2.5 | length 2535.9
  Top Layer w10: U1.23 2916.85,1554.15 3170,1301 3230,1301 PL3.1 ; v1(3463,1308) v1(3676,1308) ; PNRF1.3 3992.63,1864.37 U2.5
  Bottom Layer w10: PL3.1 3402,1243 3467,1308 v1(3463,1308) ; v1(3676,1308) 3676,1696 3982,2002 3982,2052 3956,2078 3883,2078 PNRF1.3
P3.0: PL3.6 U1.32 | length 883.4
  Top Layer w10: U1.32 3055.89,1929.89 3073,1912.78 3073,1786 v1@3049,1762 ; v1@3046,1765 v1@3049,1762 ; v1(3049,1757) v1@3049,1762
  Bottom Layer w10: v1(3049,1757) 3016,1724 3016,1294 3038,1272 3038,1193 PL3.6
P3.2: PL2.5 U1.34 | length 1220.7
  Top Layer w10: v1(2953,1936) 2986.26,1969.26 U1.34
  Bottom Layer w10: v1(2953,1936) 2995,1978 2995,2059 2907,2147 2907,2186 3039,2318 3039,2894 PL2.5
P3.3: PL2.7 U1.35 | length 1143.3
  Top Layer w10: v1(2954,2019) 2984.06,1988.94 U1.35
  Bottom Layer w10: v1(2954,2019) 2954,2068 2884,2138 2884,2194 3016,2326 3016,2744 2938,2822 2938,2893 PL2.7
P3.5: PL3.17 U1.37 | length 2157.5
  Top Layer w10: PL3.17 2437,1192 2437,1119 2471,1085 3329,1085 3351,1107 3351,1285 3097,1539 3097,1987 3055.69,2028.31 U1.37
P3.6: PL3.20 U1.38 U3.7 | length 4366.5
  Top Layer w10: v1(1302,2047) 1401,2047 v1(1411,2057) ; U3.7@1695.45,2322.45 U3.7 ; PL3.20 2388,1120 2448,1060 3341,1060 3379,1098 3379,1297 3122,1554 3122,2005 3079,2048 U1.38
  Bottom Layer w10: v1(1302,2047) 1253,1998 1253,1901 2011,1143 PL3.20 ; v1(1411,2057) 1469,2057 1695.45,2283.45 U3.7
P3.7: PL3.19 U1.39 U3.1 | length 4338
  Top Layer w10: PL3.19 2332,1187 2332,1124 2423,1033 3353,1033 3406,1086 3406,1311 3149,1568 3149,2015 3096.32,2067.68 U1.39
  Bottom Layer w10: U3.1 1353,2083.45 1353,1857 1967,1243 PL3.19
P4.0: PL2.8 PS1.1 U1.56 | length 2312.4
  Top Layer w10: PS1.1 1820,2951 1883,2888 2223,2888 2400,3065 2793,3065 2867,3139 2910,3139 3039,3010 3039,2919 2988,2868 PL2.8 2988,2835 2921,2768 2892,2768 2857.8,2733.8 U1.56
P4.1: PL2.9 PS2.2 U1.57 | length 4742.5
  Top Layer w10: U1.57 2838.11,2751.11 2880,2793 2908,2793 2937,2822 2937,2864 2888,2913 PL2.9 v1(2888,3098)
  Bottom Layer w10: PS2.2 409,1935 409,2886.37 447.63,2925 1665,2925 1886,2704 2180,2704 2260.5,2784.5 2260.5,2999.5 2359,3098 v1(2888,3098)
P4.2: PL2.10 PS3.2 U1.58 | length 3181.6
  Top Layer w10: U1.58 2818.43,2768.43 2888,2838 PL2.10
  Bottom Layer w10: PL2.10 2888,2876 2939,2927 2939,2968 2966,2995 3751,2995 4695,2051 4695,1993 4720,1968 4792,1968 4810,1986 4810,2075 PS3.2
P4.3: PL2.11 U1.59 | length 624.5
  Top Layer w10: PL2.11 2788,2906 2834,2860 2834,2826 2798.74,2790.74 U1.59
P4.4: PL2.12 U1.60 | length 494.6
  Top Layer w10: U1.60 2779.06,2834.06 PL2.12
P4.5: PL2.14 U1.61 | length 520.4
  Top Layer w10: PL2.14 2759.37,2771.63 U1.61
P4.6: PL2.15 U1.62 | length 668.9
  Top Layer w10: PL2.15 2588,2925 2639,2874 2639,2821 2671,2789 2697,2789 2739.68,2746.32 U1.62
P4.7: PL2.16 U1.63 | length 545.5
  Top Layer w10: PL2.16 2720,2711 U1.63
P5.0: PL3.16 U1.64 U3.9 | length 4687.4
  Top Layer w10: v1(2553,1978) 2553,2014 2617,2078 2617,2129 2678,2190 v1(2800,2190) ; U1.64 2700.31,2319.69 2742,2278 v1(2742,2274)
  Bottom Layer w10: U3.9 2197,2641 2263,2575 2263,2149 2394,2018 2513,2018 v1(2553,1978) ; PL3.16 2588,1131 2697,1022 3582,1022 3623,1063 3623,1289 3419,1493 3182,1493 3063,1612 3063,1667 3118,1722 3118,1793 3085,1826 2991,1826 2911,1906 2911,2055 2742,2224 v1(2742,2274)
P5.1: PL3.15 R5.1 U1.65 U3.15 | length 3846.9
  Top Layer w10: v3(2673,2428) 2680.63,2420.37 U1.65
  Top Layer w16: R5.1 1097.56,2772.44 1195.45,2674.55 U3.15
  Bottom Layer w10: PL3.15 2588,1282 2633,1327 2695,1327 2743,1375 2743,1736 2713,1766 2635,1766 2608,1793 2608,1984 2542,2050 2402,2050 2288,2164 2288,2336 2380,2428 2464,2428 v3(2673,2428)
  Bottom Layer w12: U3.15 1195.45,2744.45 1350,2899 1650,2899 1875,2674 2218,2674 2464,2428
P5.2: PL3.18 U1.66 | length 3133.7
  Top Layer w10: U1.66 2660.94,2290.06 v1(2679,2272)
  Bottom Layer w10: PL3.18 2538,1193 2603,1193 2638,1158 2638,1119 2713,1044 3567,1044 3600,1077 3600,1274 3407,1467 3164,1467 3037,1594 3037,1679 3091,1733 3091,1779 3069,1801 2981,1801 2889,1893 2889,2038 2679,2248 v1(2679,2272)
P5.4: PL2.18 PS3.1 U1.68 | length 3537.2
  Top Layer w10: PL2.18 2545,2786 2607,2786 2693,2700 2693,2518 2621.57,2446.57 U1.68
  Bottom Layer w10: PL2.18 2488,2873 2440,2921 2440,2972 2490,3022 3763,3022 PS3.1
P5.5: PL2.20 U1.69 U3.2 | length 2343.6
  Top Layer w10: v1(1623,2851) 1631,2843 PL2.20 2430.69,2843 2514.69,2759 2593,2759 2665,2687 2665,2532 2601.89,2468.89 U1.69
  Bottom Layer w10: U3.2 1244,2389.55 1244,2759 1357,2872 1602,2872 v1(1623,2851)
P5.6: PL3.7 PNRF1.2 U1.70 U2.6 | length 3111.7
  Top Layer w10: U1.70 2582.2,2309.8 2616,2276 2614,2274 v1(2614,2273) 2607,2266 v1@2599,2274 ; v1(2944,2427) v1(3088,2427) ; PNRF1.2 3957.2,1799.8 U2.6
  Bottom Layer w10: v1(2944,2427) 2816,2427 2718,2329 2670,2329 v1(2614,2273) 2868,2019 2868,1881 2988,1761 PL3.7 ; v1(3088,2427) 3285,2230 3584,2230 3731,2083 PNRF1.2
P5.7: PL3.8 PNRF1.7 U1.71 U2.1 | length 3697.1
  Top Layer w10: v1(2551,2275) 2551,2279 2562.52,2290.52 U1.71 ; v1(3539,1165) 3540,1166 v1(3678,1166) ; U2.1 4071.37,1866.37 PNRF1.7
  Bottom Layer w10: v1(2551,2275) 2551,2265 2845,1971 2845,1868 2956,1757 2956,1292 2937,1273 2937,1213 2956,1194 2956,1175 PL3.8 3043,1088 3462,1088 v1(3539,1165) ; v1(3678,1166) 3680,1166 3681,1165 3751,1235 3751,1684 4027,1960 4165,1960 PNRF1.7
P6.0: PL2.3 PS2.1 U1.54 | length 5314.5
  Top Layer w10: U1.54 2897.17,2681.17 2928,2712 3034,2712 3137,2815 3137,2892 PL2.3 v1(3188,3097)
  Bottom Layer w10: PS2.1 389,1855 389,2900 439,2950 1679,2950 1899,2730 2167,2730 2235,2798 2235,3010 2364,3139 2913,3139 2955,3097 v1(3188,3097)
P6.1: PL2.6 PS1.2 U1.55 | length 2350.3
  Top Layer w10: PS1.2 1920,2949 1965,2904 2211,2904 2391,3084 2784,3084 2858,3158 2918,3158 3086,2990 3110,2990 3138,2962 3138,2926 3088,2876 PL2.6 3067,2843 2965,2741 2905,2741 2877.48,2713.48 U1.55
P6.4: PL2.19 R11.1 U1.78 | length 3591.8
  Top Layer w10: R11.1 533,2523 744,2734 v1(744,2998) ; v1(941,3002) 961,3022 1371,3022 1498,2895 1653,2895 1679,2869 2314,2869 PL2.19 ; v1(2356,2322) 2356,2267 2378.15,2244.85 U1.78
  Bottom Layer w10: v1(744,2998) 748,3002 v1(941,3002) ; v1(2356,2322) 2467,2322 2528,2383 2693,2383 2720,2410 2720,2590 2517,2793 2465,2793 2438,2820 2438,2893 PL2.19
P6.5: PL2.17 R12.1 U1.79 | length 3729.8
  Top Layer w10: U1.79 2466.17,2225.17 2475,2234 v1(2480,2234) ; v1(2418,3024) 2488,2954 PL2.17 ; v1(4659,2613) 4752.43,2613 R12.1
  Bottom Layer w10: v1(2418,3024) 2444,3050 3777,3050 4214,2613 v1(4659,2613) ; v1(2480,2234) 2480,2290 2546,2356 2704,2356 2752,2404 2752,2598 2539,2811 2539,2892 PL2.17
P6.6: PL3.9 R13.1 U1.80 | length 4368
  Top Layer w10: R13.1 482.43,1468 v1(612,1468) ; v1(1640,1438) 1697,1438 1755,1496 v1(1755,1544) ; v1(2022,1819) v1(2022,2047) ; v1(2218,2535) 2218,2519 2309,2428 2309,2273 2376.52,2205.48 U1.80 2449.52,2205.48 2464,2191 v1(2544,2191)
  Bottom Layer w10: v1(612,1468) 642,1438 v1(1640,1438) ; v1(1755,1544) 1872,1544 2022,1694 v1(2022,1819) ; v1(2022,2047) 2022,2456 2101,2535 v1(2218,2535) ; v1(2544,2191) 2580,2191 2583,2194 2822,1955 2822,1857 2888,1791 PL3.9
P6.7: PL3.11 R14.1 U1.81 | length 3609.4
  Top Layer w10: v1(2332,2187) 2333.2,2185.8 U1.81 ; v1(3536,1094) v1(3673,1094) ; v1(4641,1473) 4741.13,1473 R14.1
  Bottom Layer w10: v1(2332,2187) 2441,2078 2617,2078 2780,1915 2780,1832 2828,1784 2828,1306 2788,1266 PL3.11 2788,1206 2837,1157 2837,1097 2868,1066 3508,1066 v1(3536,1094) ; v1(3673,1094) 3700,1094 3849,1243 4398,1243 4628,1473 v1(4641,1473)
RST: PL1.6 PL3.10 U1.83 | length 2410
  Top Layer w10: PL1.6 2072,2126 2072,2504 2094,2526 2155,2526 2276,2405 2276,2174 2303.57,2146.43 U1.83 2482.57,2146.43 v1(2503,2126)
  Bottom Layer w10: v1(2503,2126) 2608,2126 2609,2127 2801,1935 2801,1846 2850,1797 2850,1287 2838,1275 2838,1193 PL3.10
RXD: PFTDI1.2 PL1.4 U1.6 U4.4 | length 1815.6
  Top Layer w10: v1(2560,1637) 2560,1683 2582.2,1705.2 U1.6
  Top Layer w12: U4.4 1307.5,1704.5 1353,1750 1353,1953 1375,1975 1450.15,1975 PFTDI1.2
  Bottom Layer w10: PFTDI1.2 1552.15,1873 PL1.4 2291,1873 2325,1839 2380.91,1839 2560,1659.91 v1(2560,1637)
TCK: PL1.8 U1.95 | length 562.4
  Top Layer w10: v1(2344,1884) 2370.2,1910.2 U1.95
  Bottom Layer w10: PL1.8 2185,2213 2185,2043 v1(2344,1884)
TDI: PL1.10 U1.92 | length 684.6
  Top Layer w10: PL1.10 2232,2366 2232,2050 2312.74,1969.26 U1.92
TDO: PL1.9 U1.93 | length 623.8
  Top Layer w10: PL1.9 2204,2294 2204,2025 2279.43,1949.57 U1.93
TEST_LED: R21.1 U1.4 | length 559
  Top Layer w10: R21.1 2279,1416 v1(2313,1382) ; v1(2490,1660) 2490,1668 2505,1683 2527,1683 2542.83,1698.83 U1.4
  Bottom Layer w10: v1(2313,1382) 2313,1483 v1(2490,1660)
TMS: PL1.7 U1.94 | length 456
  Top Layer w10: PL1.7 2178,2120 2178,2010 2258.11,1929.89 U1.94
TXD: PFTDI1.3 PL1.5 U1.7 U4.20 | length 1600.5
  Top Layer w10: PL1.5 2316,1782 2454,1782 2529,1857 2580,1857 2601.89,1835.11 U1.7
  Top Layer w16: PFTDI1.3 1455.46,1869.69 U4.20
  Bottom Layer w10: PFTDI1.3 1448.15,1973 PL1.5
pads on no net: PFTDI1.1 PFTDI1.5 PU1.4 U1.1 U1.2 U1.3 U1.5 U1.8 U1.16 U1.17 U1.18 U1.24 U1.25 U1.26 U1.27 U1.28 U1.29 U1.30 U1.31 U1.33 U1.36 U1.41 U1.42 U1.46 U1.47 U1.48 U1.49 U1.50 U1.51 U1.52 U1.53 U1.67 U1.74 U1.75 U1.76 U1.77 U1.85 U1.86 U1.88 U1.89 U1.90 U1.91 U1.96 U1.97 U1.98 U1.99 U1.100 U4.1 U4.2 U4.5 U4.7 U4.8 U4.9 U4.18 U4.19 Y1.2 Y1.4

## Polygon pours and split planes (outlines as drawn)
GND on Top Layer "GND_L01_P014" (solid, pour order 14): 2838.11,1393.11 2838.11,1524 2466,1524 2356,1634 2346,1624 1939,1624 1870,1624 1737,1757 1715,1779 1715,2000 970,2000 1067,2097 1932,2097 1932,2240 1816,2240 1719,2143 961,2143 889,2215 469,2215 469,1020 2311,1020 2311,1234 2383,1306 2391,1314 2760,1314
GND on Top Layer "GND_L01_P016" (solid, pour order 16): 3726,1020 4749,1020 4749,1190 4480,1459 4022.5,1459 4022.5,1633.5 3787,1869 3508,1869 3394,1983 3400,1989 3400,2158 3168,2158 3168,1545 3214,1499 3254,1459 3604,1459 3726,1337
GND on Top Layer "GND_L01_P018" (solid, pour order 18): 3336,2808 3614,3086 4760,3086 4760,2684 4716,2676.84 4716,2641.37 4760,2625 4760,2280 4628,2280 3858,2280 3759,2379 3759,2640 3661,2640 3661,2532 3661,2531 3610,2480 3381,2480 3336,2525

## Keep-outs
Keep-Out Layer:
  the board outline again, w1

## Other copper
Top Layer:
  pour cut-out: 1595,1435 1504,1435 1449.72,1380.72 1449.72,1296.39 1415.39,1296.39 1346,1227 1336,1237 1137,1237 1017,1117 1017,1110 1003,1110 975,1138 982,1145 982,1378 1056,1378 1244.83,1566.83 1244.83,1679.5 1272.5,1679.5 1323,1730 1326,1727 1419,1727 1500,1646 1510,1656 1577,1656
  region net GND: 1362,2861 1345,2861 1338,2861 1338,2821 1345,2821 1345,2288 1365,2268 1382,2251 1516,2251 1546,2281 1546,2390 1566,2410 1855,2410 2214,2769 2214,2799 2192,2821 1878,2821 1843,2786 1843,2593 1820,2570 1680.5,2570 1661,2550.5 1548.5,2550.5 1529,2570 1520,2579 1520,2735
  region net GND: 3133.5,2104.5 3091,2147 3069,2147 3069,2086 3070.37,2087.37 3116.36,2087.37
  region net GND: 4240,1972 4237,1972 4190,1925 4190,1876 4495,1876 4515,1896 4439,1972
Bottom Layer:
  region net GND: 2233,3223 4711,3223 4711,2673 4228.25,2673 3811,3090.25 3288.25,3090.25 3226,3152.5 3152.5,3152.5 3128,3128 3001,3128 2962,3167 2355,3167 2207,3019 2207,2818 2146,2757 1919,2757 1700,2976 1472,2976 1409,3039 1409,3060 1543,3060 1611,3128 1748,3128 1748,3057 2067,3057
  region net GND: 3981,1698 3981,1630 3919,1568 3919,1281 4377,1281 4539,1443 4539,1873 4439,1973 4238,1973 4195,1930 4195,1698
  region net GND: 1345,2730 1547,2730 1547,2570 1990,2570 1990,2110 1951,2071 1842,2071 1842,2410 1550,2410 1550,2260 1345,2260

## Silkscreen, mask and mechanical layers (free items; w line width, h text height)
Top Overlay:
  lines w1: 374,1060 374,1010 424,1010 ; 374,3188 374,3238 424,3238 ; 4789,1010 4839,1010 4839,1060 ; 4789,3238 4839,3238 4839,3188
  text "4485 x 2249 mil" at 3961,3295 h60
  text "+" at 1459.01,3031 h60 r270
  text "-" at 1559.01,3031 h60 r270
  text "OUT" at 1790.01,3030 h60 r270
  text "EN" at 1890.01,3030 h60 r270
  text "5V" at 1990.01,3030 h60 r270
  text "GND" at 2090.01,3030 h60 r270
  text "-" at 4626,2896.01 h60
  text "-" at 562,2800.01 h60
  text "M2-" at 690,2796.43 h60
  text "+" at 4626,2796.01 h60
  text "+" at 564,2700.01 h60
  text "M2+" at 690,2696.43 h60
  text "M1+" at 692,2530.43 h60
  text "TDI" at 1899.99,2443.01 h60
  text "M1-" at 692,2430.43 h60
  text "TDO" at 1880,2343.01 h60
  text "MISO" at 3801.01,2325.96 h60 r270
  text "MOSI" at 3901.01,2315.97 h60 r270
  text "GND" at 4498,2300.01 h60
  text "GND" at 3601.01,2275.98 h60 r270
  text "SCK" at 4001.01,2275.98 h60 r270
  text "CSN" at 4101.01,2275.98 h60 r270
  text "VCC" at 4301.01,2275.98 h60 r270
  text "IRQ" at 3701.01,2265.98 h60 r270
  text "TCK" at 1880,2243.01 h60
  text "CE" at 4201.01,2216 h60 r270
  text "5V" at 4557.98,2200.01 h60
  text "GND" at 1070.16,2170 h60 r270
  text "CTS" at 1170.16,2170 h60 r270
  text "VCC" at 1270.16,2170 h60 r270
  text "DTR" at 1570.16,2170 h60 r270
  text "TMS" at 1880,2143.01 h60
  text "TX" at 1370.16,2110.02 h60 r270
  text "RX" at 1470.16,2110.02 h60 r270
  text "OUT" at 4498,2100.01 h60
  text "RST" at 1880,2043.01 h60
  text "GND" at 565,2040.01 h60
  text "EN" at 4557.98,2000.01 h60
  text "TXD" at 1880,1943.01 h60
  text "5V" at 565,1940.01 h60
  text "RXD" at 1880,1843.01 h60
  text "OUT" at 565,1840.01 h60
  text "3V3" at 1880,1743.01 h60
  text "EN" at 565,1740.01 h60
  text "5V" at 1939.98,1643.01 h60
  text "GND" at 1880,1543.01 h60
  text "RX" at 1733,1181 h60 r270
  text "TX" at 916,1175 h60 r270
  text "+" at 566,1165.01 h60
  text "+" at 4614,1164.01 h60
  text "-" at 566,1065.01 h60
  text "-" at 4614,1064.01 h60
Bottom Overlay:
  text "ECEN 2020 Final Project / Heinz Boehmer / Albert Dayn / Christopher Morroni" at 4849,1000 h150